# Altium PCB 充电.PcbDoc
Units mil, origin at the board's own origin, x right, y up, seen from the top; angles counter-clockwise.
Board outline 390 x 390 mil, 2 copper layers (Top Layer, Bottom Layer); 7 components, 0 nets, 34 pads, 3 vias.
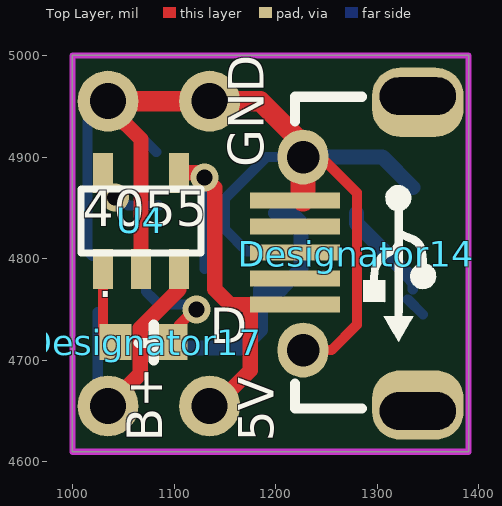
[diagram p0: Top Layer view]
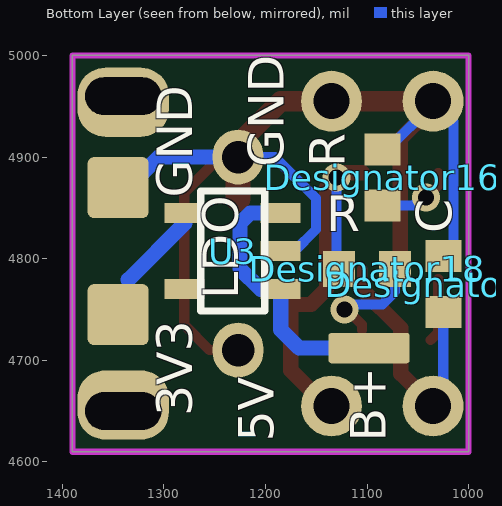
[diagram p1: Bottom Layer view, seen from below]

## Layer stack, top to bottom
Top Solder: solder mask 0.4, Solder Resist, Dk 3.5
Top Layer: signal copper 1.4
Dielectric 1: dielectric 12.6, FR-4, Dk 4.8
Bottom Layer: signal copper 1.4
Bottom Solder: solder mask 0.4, Solder Resist, Dk 3.5

## Board outline
1000,5000 1000,4610 1390,4610 1390,5000

## Design rules (kind name [scope] priority, off if disabled: settings)
Clearance [All] p1: gap=10
PolygonConnect [All] p1: connectstyle=Relief reliefconductorwidth=10 reliefentries=4 polygonreliefangle="90 Angle" airgapwidth=10
RoutingVias [All] p1: holewidth=28 width=50 viastyle="Through Hole" minholewidth=28 minwidth=50 maxholewidth=28 maxwidth=50
SolderMaskExpansion [All] p1: expansion=4
Width [All] p1: maxlimit=20 minlimit=10 preferedwidth=10 minimp=50.000000 maximp=50.000000 favimp=50.000000
29 further rules are at their usual default settings.

## Components (designator, comment, footprint, x,y, rotation, side; value= is the part's Value field where it differs from the comment)
Designator14 "Comment" 充电usb座 1330,4805 r270 top
Designator16 "Comment" 1608[0603] 1085,4880 r270 bottom
Designator17 "Comment" 1608[0603] 1070,4718 r0 top
Designator18 "Comment" 1608[0603] 1100,4790 r0 bottom
Designator19 "Comment" 1608[0603] 1025,4775 r270 bottom
U3 "ldo3.3v" sot23_5 1235,4810 r270 bottom
U4 "充电管理" sot23_5 1070,4840 r180 top

## Footprints (in the part's own frame and the unit in brackets; to place one, negate y for a bottom-side part, rotate by r counter-clockwise, add the part's x,y. Pads: shape width x height; smd on the part's side, far side on the other; paste and mask are expansions set on the pad)
1608[0603] [mm] "Chip Capacitor, Body 1.6x0.8mm, IPC High Density"
  rect 0.8x0.9 smd: 1(-0.7,0) 2(0.7,0)
  body extent -0.87,-0.48 0.87,0.48, height 1.3
sot23_5 [mm]
  rect 0.5x1 smd: 1(1.016,1.27) 2(0.066,1.27) 3(-0.884,1.27) 4(-0.884,-1.13) 5(1.016,-1.13)
  silkscreen extent -1.43,-0.73 1.57,0.87, body extent -1.38,-1.33 1.52,1.47, height 1.09
充电usb座 [mil]
  oval 54x50 hole 32 mask+0: 0(-95,-103) 0(95,-103)
  rect 15.75x88.58 smd: 1(50.18,-110.87) 2(24.59,-110.87) 3(-1,-110.87) 4(-52.18,-110.87) 5(-26.59,-110.87)
  rrect80% 68x90 hole 37 slot 75 at 90 deg copper offset 6,0 mask+0: 4(-155,10)
  rrect80% 68x90 hole 37 slot 75 at 90 deg copper offset -6,0 mask+0: 4(155,10)
  silkscreen extent -154,-111 152,28

## Part data
U3 U4: library part Component_1

## Free pads (board coordinates)
  round 60 hole 35.43: 0(1035,4955) 0(1135,4955) 1(1035,4655) 1(1135,4655)
  rrect20% 80x30 smd far side: 1(1098,4712)
  rrect20% 60x60 smd far side: 1(1345,4745) 1(1345,4870)

## Via types
v1: diameter 27.56, hole 15.75, Top Layer to Bottom Layer, tented both sides, 3 vias

## Nets (pads, with @x,y where several pads share a name; then routed paths per layer and width w, separated by ;. In a path a pad name is that pad's centre, name@x,y a point inside that pad or via, vN(x,y) a via of type N, cw(c..) or ccw(c..) an arc to the next point about the centre after c; other vN are vias at no path point)
pads on no net: Designator14.0 Designator14.1 Designator14.2 Designator14.3 Designator14.4 Designator14.5 Designator16.1 Designator16.2 Designator17.1 Designator17.2 Designator18.1 Designator18.2 Designator19.1 Designator19.2 U3.1 U3.2 U3.3 U3.4 U3.5 U4.1 U4.2 U4.3 U4.4 U4.5
copper on no net: | length 2497.6
  Top Layer w10: 1030,4780 1030,4727.44 1037.44,4720 ; 1030,4884.49 1030,4872 v1(1042,4860) ; 1104.8,4769.8 1104.8,4790 ; 1104.8,4774.8 1104.8,4790 ; 1104.8,4776.66 1104.8,4790 ; 1105,4730 1105,4735 v1@1120,4750 ; 1125,4935 1125,4955 ; 1135,4655 1145,4665 ; 1165.18,4754.82 1165,4754.82 1180,4755 1175,4750 ; 1227,4710 1255,4710 1280,4735 1280,4865 1245,4900 1227,4900
  Top Layer w15: 1035,4655 1066.81,4686.81 1066.81,4731.81 1104.8,4769.8 ; 1040,4945 1067.4,4917.6 1067.4,4790 ; 1104.8,4884.49 1125.51,4884.49 1140,4870 1140,4770 1155,4755 1180,4755 ; 1145,4660 1175,4690 1175,4750
  Top Layer w20: 1035,4955 1140,4955 ; 1135,4955 1185,4955 1221.43,4918.57
  Top Layer w25: 1227,4859 1227,4900
  Bottom Layer w10: 1013.22,4809.34 1020,4802.56 ; 1015,4809.34 1015,4933.22 ; 1015,4935 1035,4955 1035,4952.56 1082.5,4905.06 ; 1025,4747.44 1025,4675 1035,4665 ; v1(1042,4860) 1047.28,4860 1054.84,4852.44 1085,4852.44 ; 1072.44,4790 1072.44,4767.56 1080,4760 1085,4755 1091.22,4755 1115,4755 v1@1120,4750 ; 1130,4790 v1(1130,4880) ; 1185,4807.4 1171.66,4807.4 1150.31,4828.75 1150.31,4829.69 1150.31,4859.61 1190.7,4900 1205,4900 ; 1330,4760 1345,4745 ; 1335,4770 1335,4779.29
  Bottom Layer w15: 1098,4712 1166.9,4712 1185,4730.1 1185,4770 1205,4770 1225,4790 1225,4835 1215,4845 1200,4845 ; 1235,4900 1305,4900 1335,4870 ; 1279.49,4844.8 1279.49,4834.8 1335,4779.29
  other v1: 1122,4750

## Keep-outs
Keep-Out Layer:
  the board outline again, w6

## Silkscreen, mask and mechanical layers (free items; w line width, h text height)
Top Overlay:
  lines w10: 1065,4717 1080,4717 ; 1080,4700 1080,4735
  text "GND" at 1200,4890 h60 r90
  text "4055" at 1010,4820 h60
  text "." at 1025,4750 h60
  text "D" at 1135,4705 h60
  text "B+" at 1100,4620 h60 r90
  text "5V" at 1210,4620 h60 r90
Bottom Overlay:
  text "R" at 1110,4890 h60 r270
  text "GND" at 1170,4890 h60 r270
  text "GND" at 1260,4860 h60 r270
  text "C" at 1005,4825 h60 r270
  text "R" at 1140,4815 h60
  text "LDO" at 1215,4760 h60 r270
  text "3V3" at 1260,4645 h60 r270
  text "B+" at 1070,4620 h60 r270
  text "5V" at 1180,4620 h60 r270